# EAGLE board IR_sensor_new_v3 (EAGLE 9.7.0)
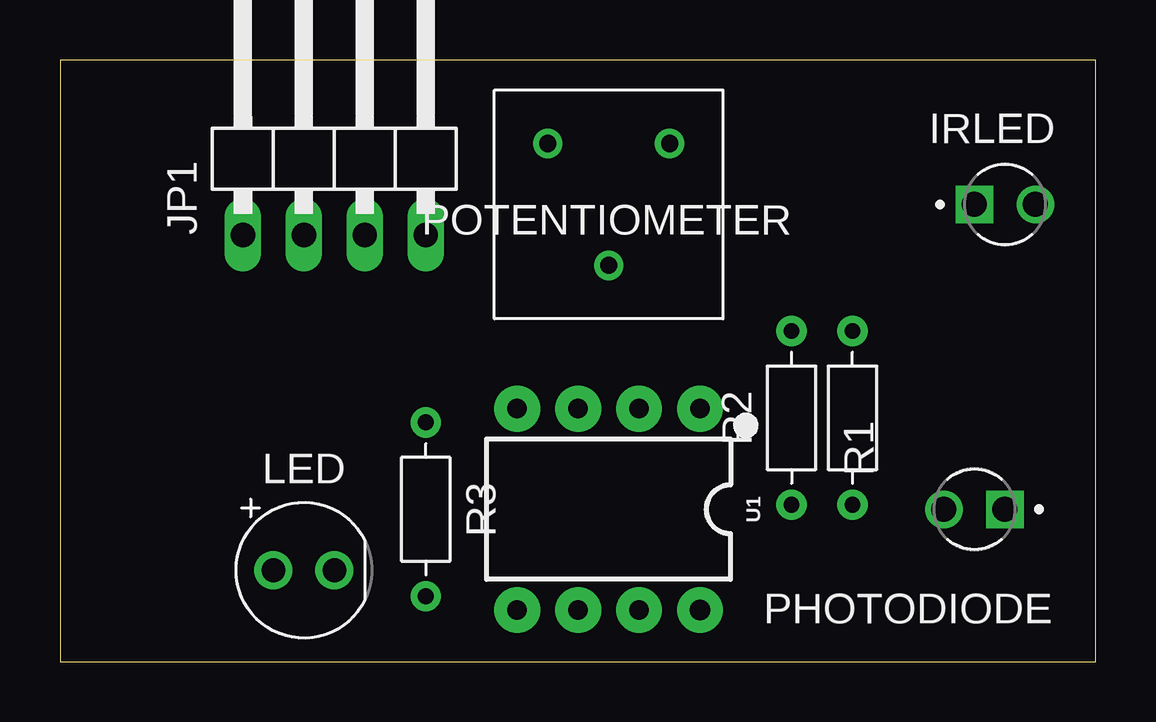
[diagram p0: board, top side]
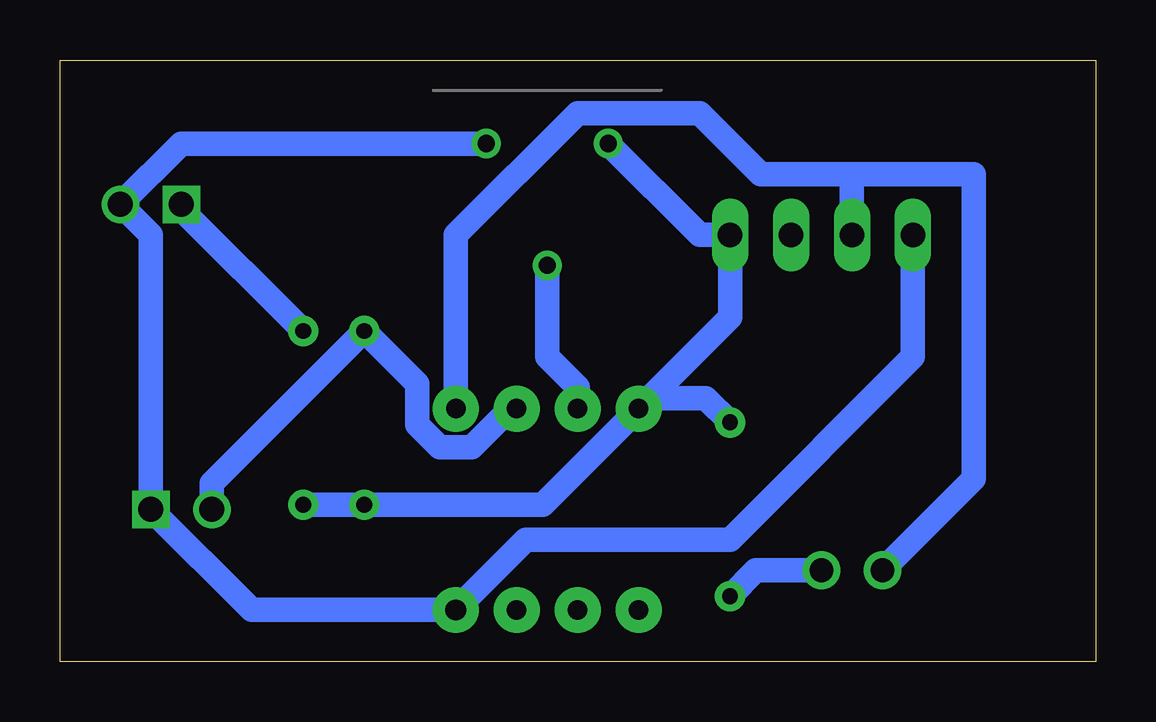
[diagram p1: board, bottom side, seen from below]

Size 43.16 x 25.07 mm. Coordinates in mm from the lower left corner, seen from the top.
Outline: 0,0 43.16,0 43.16,25.07 0,25.07 0,0
Copper layers (1*16): Top 0.035mm / dielectric 1.5mm / Bottom 0.035mm
Design rules "Fusion Electronics Design Rules": minimum track width 6mil, minimum drill 0.35mm, track to track 6mil, track to pad 6mil, pad to pad 6mil, via to via 6mil, smd to smd 6mil, copper to edge 40mil, drill to drill 6mil, minimum pad ring 10mil, minimum via ring 8mil, stop-mask expansion 4mil, vias tented up to drill 0mil, thermal gap 10mil

## Footprints (pad centres in the part's own frame; a part is rotated, then mirrored left to right if it is on the bottom)
LEDRD254W45D335H610 = drill 1.04 pad 1.56: A 1.27,0 | drill 1.04 pad 1.56 square: C -1.27,0
1X04/90 = drill 1.016 long: 1 -3.81,-3.81; 2 -1.27,-3.81; 3 1.27,-3.81; 4 3.81,-3.81
LEDRD254W60D565H860B_Y = drill 0.981 pad 1.581: A -1.27,0; C 1.27,0
3310Y-001-104L-ND = drill 0.71: 1 -2.54,-2.54; 2 0,2.54; 3 2.54,-2.54
RESAD724W46L381D178B = drill 0.66 pad 1.26: 1 -3.62,0; 2 3.62,0
DIP08-KIT = drill 0.813 pad 1.905: 1 -3.81,-4.191; 2 -1.27,-4.191; 3 1.27,-4.191; 4 3.81,-4.191; 5 3.81,4.191; 6 1.27,4.191; 7 -1.27,4.191 | drill 0.864 pad 1.905: 8 -3.81,4.191

## Placement (x,y rotation side)
IRLED  TSAL4400  [LEDRD254W45D335H610]  39.37,19.05 0 top
JP1  [1X04/90]  11.43,21.59 0 top
LED  LED_RADIALYELLOW  [LEDRD254W60D565H860B_Y]  10.16,3.81 0 top
PHOTODIODE  TSAL4400  [LEDRD254W45D335H610]  38.1,6.35 180 top
POTENTIOMETER  3310Y-001-104L  [3310Y-001-104L-ND]  22.86,19.05 180 top
R1  [RESAD724W46L381D178B]  33.02,10.16 90 top
R2  [RESAD724W46L381D178B]  30.48,10.16 90 top
R3  [RESAD724W46L381D178B]  15.24,6.35 270 top
U1  LM358  [DIP08-KIT]  22.86,6.35 180 top

## Library data of the parts
IRLED PHOTODIODE = TSAL4400(IR LED); AVAILABILITY: In Stock; CHECK_PRICES: https://www.snapeda.com/parts/TSAL4400/Vishay+Semiconductor+Opto+Division/view-part/?ref=eda; DESCRIPTION: Infrared (IR) Emitter 940nm 1.35V 100mA 16mW/sr @ 100mA 50° Radial, 3mm Dia (T-1); MF: Vishay Semiconductor; MP: TSAL4400; PACKAGE: Radial Vishay; PRICE: None; PURCHASE-URL: https://www.snapeda.com/api/url_track_click_mouser/?unipart_id=231007&manufacturer=Vishay Semiconductor&part_name=TSAL4400&search_term=through hole ir led; SNAPEDA_LINK: https://www.snapeda.com/parts/TSAL4400/Vishay+Semiconductor+Opto+Division/view-part/?ref=snap
JP1 = AtoZlibrary
LED = Opto-Electronic
POTENTIOMETER = Potentiometer_Trimmers; CREATED_BY: PCBLayout.com; DIGIKEY_PARTNO: 3310Y-001-104L-ND; MANUFACTURER: Bourns Inc.; MPN: 3310Y-001-104L
R1-R3 = Resistor; CATEGORY: Resistor; SUB-CATEGORY: Fixed
U1 = SparkFun-IC-Amplifiers; PROD_ID: IC-09172

## Nets
GND: JP1.4 POTENTIOMETER.3 R1.1 R2.1 R3.1 U1.4
N$1: IRLED.C R1.2
N$3: PHOTODIODE.A R2.2 U1.2
N$4: LED.C R3.2
N$5: POTENTIOMETER.2 U1.3
OUTPUT: JP1.2 LED.A U1.1
VCC: IRLED.A JP1.1 PHOTODIODE.C POTENTIOMETER.1 U1.8

## Tracks (layer width: path | path; a pad name or v marks a point on that pad's centre or on a via)
GND
  Bottom 0.356: U1.4 18.61,10.99 18.4,11.19
  Bottom 1.016: POTENTIOMETER.3 16.51,17.78 JP1.4 15.24,14.35 18.4,11.19 | R3.1 16.26,10.99 18.61,10.99 | R1.1 R2.1 23.05,6.54 U1.4
N$1
  Bottom 0.356: 38.1,18.86 IRLED.C
  Bottom 1.016: R1.2 38.1,18.86
N$3
  Bottom 1.016: U1.2 24.13,10.16 24.77,10.16 26,8.93 27.34,8.93 28.28,9.87 28.28,11.58 R2.2 36.83,7.43 PHOTODIODE.A
N$4
  Bottom 1.016: LED.C 14.16,3.81 R3.2
N$5
  Bottom 1.016: POTENTIOMETER.2 22.86,12.7 21.59,11.43 U1.3
OUTPUT
  Bottom 1.016: JP1.2 10.16,20.32 | 10.16,20.32 5.08,20.32 5.08,7.62 LED.A | U1.1 26.67,17.78 21.59,22.86 16.51,22.86 13.97,20.32 10.16,20.32
VCC
  Bottom 1.016: POTENTIOMETER.1 38.1,21.59 IRLED.A 39.37,17.78 PHOTODIODE.C 35.18,2.16 U1.8 23.75,5.08 15.24,5.08 7.62,12.7 JP1.1